# Allegro board PAI-POPA.brd
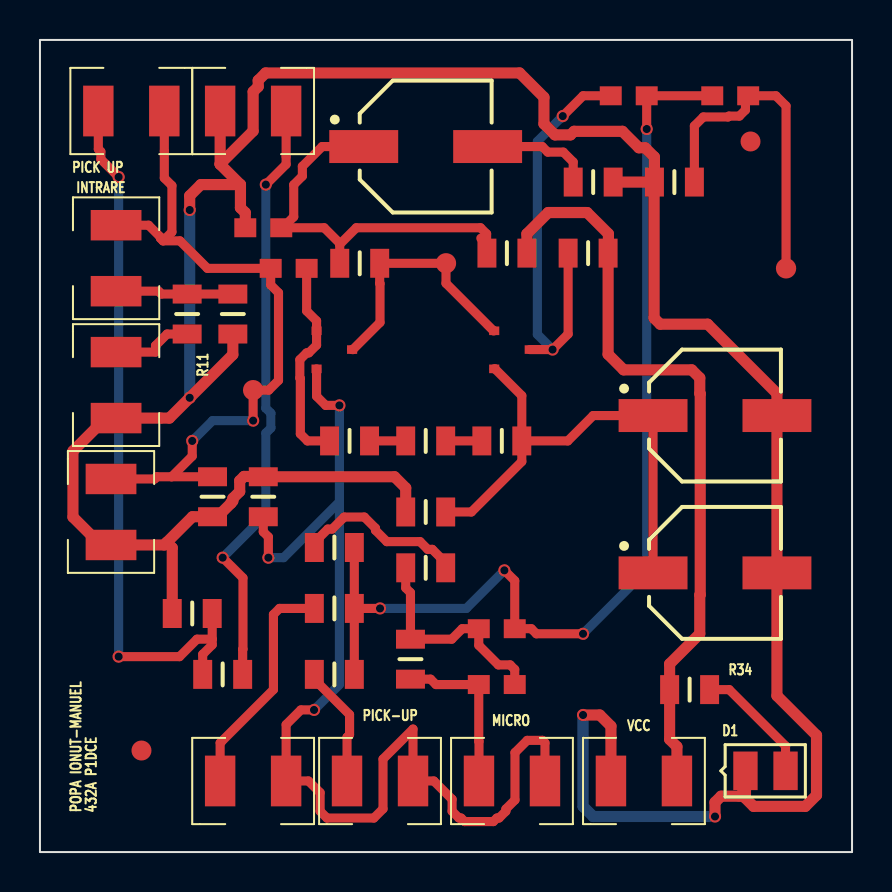
[diagram p0: board, top side]
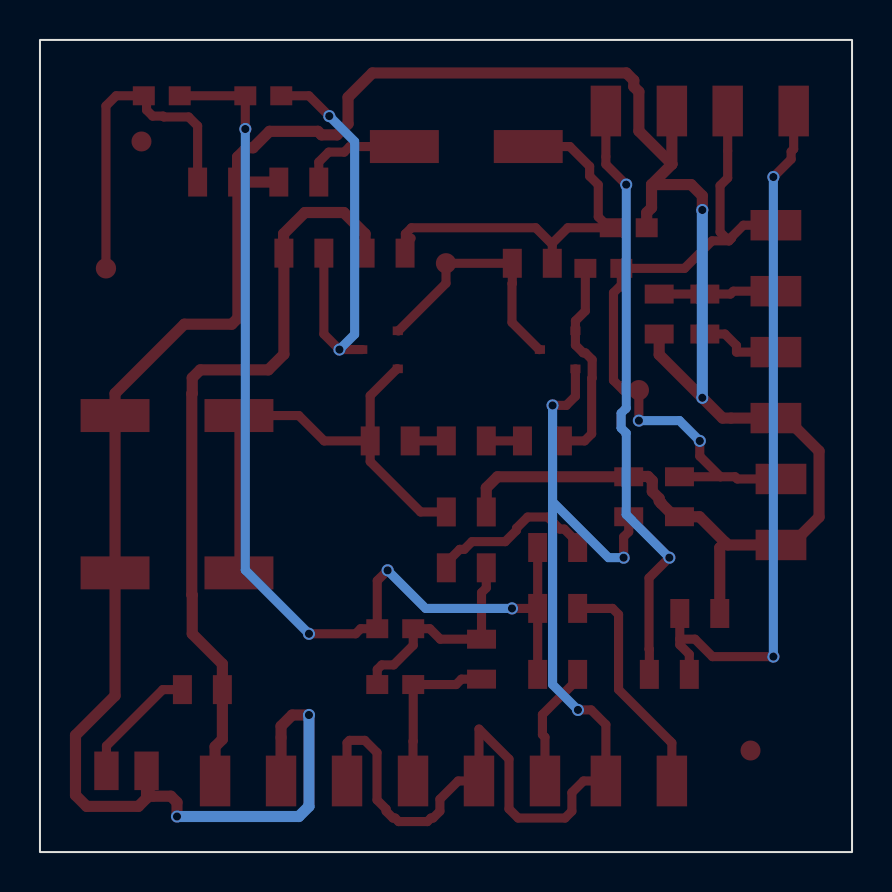
[diagram p1: board, bottom side, seen from below]

Outline 40.64 x 40.64 mm; copper layers: TOP, BOTTOM. Coordinates in mm from the lower left corner of the outline.
Outline path: rectangle 0,0 40.64,40.64

## Design rules (mm)
nets with their own width: min track width 0.305; nets 0 N12604 N12610 N12630 N12640 N12680 N12702 N12706 N12750 N12756 N12846 N13210 N13216 N13300 N13552 N14513 N14595 N15039 N15145 N15149 N16665 N16830 N21461 N130140

## Placement (name value [footprint] x y rotation side)
C11  4.7u  [CAPC2008X126N_0805]  12.45 29.21 0 top
C22  4.7u  [CAPC2008X126N_0805]  29.46 37.85 0 top
C32  4.7u  [CAPC2008X126N_0805]  34.54 37.85 0 top
C45  4.7u  [CAPC2008X126N_0805]  11.18 31.24 0 top
C46  1n  [CAPC2008X126N_0805]  22.86 8.38 0 top
C47  4.7n  [CAPC2008X126N_0805]  22.86 11.18 0 top
C48  10u  [CAPAE660X770N]  33.78 21.84 0 top
C49  10u  [CAPAE660X770N]  33.78 13.97 0 top
C50  10u  [CAPAE660X770N]  19.3 35.31 0 top
J6  -  [TP100]  20.32 29.46 0 top
J7  -  [TP100]  10.67 23.11 0 top
J12  Iesire  [TP100]  37.34 29.21 0 top
J*  1k  [RES2012X50N_0805#2]  3.81 29.72 90 top
J*#2  -  [RES2012X50N_0805#3]  35.31 4.06 0 top
J*#3  -  [RES2012X50N_0805#2]  17.02 3.56 180 top
J*#4  -  [RES2012X50N_0805#2]  30.23 3.56 180 top
J*#5  -  [RES2012X50N_0805]  32.51 8.13 180 top
MICRO  Mic., Pick-up mag  [1210RF_WV_12D]  23.62 3.56 180 top
MICRO.  Mic., Pick-up Mag.  [1210RF_WV_12D]  3.56 17.02 90 top
NOREF  -  [unnamed]  35.56 35.56 0 top
NOREF#2  -  [unnamed]  5.08 5.08 0 top
PICK UP  Pick-up Piezo  [1210RF_WV_12D]  4.57 37.08 0 top
PICK-UP  Pick-up Piezo  [1210RF_WV_12D]  10.67 37.08 0 top
Q1  QBC846B  [SOT23]  14.73 25.15 0 top
Q2  QBC846B  [SOT23]  23.62 25.15 0 top
R1  47k  [RES2012X50N_0805]  8.64 17.78 90 top
R3  10k  [RES2012X50N_0805]  19.3 20.57 0 top
R4  15k  [RES2012X50N_0805]  27.43 29.97 0 top
R5  1k  [RES2012X50N_0805]  19.3 17.02 0 top
R6  220k  [RES2012X50N_0805]  15.49 20.57 0 top
R7  100k  [RES2012X50N_0805]  14.73 12.19 0 top
R8  10k  [RES2012X50N_0805]  23.11 20.57 0 top
R11  100k  [RES2012X50N_0805]  7.37 26.92 90 top
R12  4.7k  [RES2012X50N_0805]  9.65 26.92 90 top
R13  22k  [RES2012X50N_0805]  31.75 33.53 0 top
R18  1k  [RES2012X50N_0805]  11.18 17.78 270 top
R21  68k  [RES2012X50N_0805]  16 29.46 180 top
R22  150k  [RES2012X50N_0805]  23.37 29.97 0 top
R25  1M  [RES2012X50N_0805]  27.69 33.53 180 top
R28  220k  [RES2012X50N_0805]  14.73 8.89 0 top
R29  68k  [RES2012X50N_0805]  18.54 9.65 90 top
R30  510k  [RES2012X50N_0805]  19.3 14.22 0 top
R31  330k  [RES2012X50N_0805]  14.73 15.24 0 top
R32  15k  [RES2012X50N_0805]  7.62 11.94 0 top
R33  1M  [RES2012X50N_0805]  9.14 8.89 0 top
RADIO  Radio, Mag.  [1210RF_WV_12D]  10.67 3.56 180 top
RADIO.  Intrare  [1210RF_WV_12D]  3.81 23.37 90 top

## Library data of the parts
C11 C22 C32 C45-C47 = C
C48-C50 = CAPACITOR POL_16
J6 J7 J12 = CON1
J* R1 R3-R8 R11-R13 R18 R21 R22 R25 R28-R33 = R
MICRO MICRO. PICK UP PICK-UP RADIO RADIO. = CON2
Q1 Q2 = QBC846B_2

## Footprints (pads in the part's own frame, mm; a bottom-side part is the same pattern mirrored in y, then rotated)
1210RF_WV_12D
  rect 1.524x2.54 smd: 1(-1.651,0) 2(1.651,0)
CAPAE660X770N
  rect 3.45x1.65 smd: 1(-3.1,0) 2(3.1,0)
CAPC2008X126N_0805
  rect 1.1x0.95 smd: 1(-0.9,0) 2(0.9,0)
RES2012X50N_0805
  rect 0.95x1.45 smd: 1(-1,0) 2(1,0)
RES2012X50N_0805#2
  rect 1.524x2.54 smd: 1(-1.651,0) 2(1.651,0)
RES2012X50N_0805#3
  rect 1.219x1.93 smd: A(2.007,0) C(0,0)
SOT23
  rect 0.508x0.432 smd: 1(-0.889,0.94) 2(-0.889,-0.965) 3(0.889,0)
TP100
  round 1.016 smd: 1(0,0)
unnamed
  round 1 smd: (0,0)

## Nets
0: C45.1 C48.2(-) C49.2(-) J*#2.C J*#4.2 MICRO..1 PICK-UP.1 R1.1 R5.1 R12.1 R13.1 R18.1 R25.1 R32.1 RADIO..1
N12604: R11.1 RADIO..2
N12610: J*.1 R11.2 R12.2
N12630: C11.1 J7.1 J*.2 MICRO..2 PICK UP.2 R1.2
N12640: C11.2 Q1.1(B) R6.1
N12680: J*#3.1 MICRO.1 Q1.2(E) R18.2 RADIO.1
N12702: J6.1 Q1.3(C) Q2.1(B) R21.1
N12706: J*#4.1 J*#5.2 R4.2 R22.2
N12750: C22.1 Q2.3(C) R4.1
N12756: C48.1(+) C49.1(+) Q2.2(E) R5.2 R8.2
N12846: C22.2 C32.1 C47.2 R7.2 R28.2 R31.2
N13210: R3.2 R8.1
N13216: C45.2 C50.1(+) R21.2 R22.1
N13300: C32.2 J12.1 R13.2
N13552: C50.2(-) R25.2
N14513: R7.1 RADIO.2
N14595: J*#3.2 R28.1
N15039: C46.1 MICRO.2 R29.1
N15145: R30.2 R31.1
N15149: C46.2 C47.1 R29.2 R30.1
N16665: PICK UP.1 R32.2 R33.1
N16830: PICK-UP.2 R33.2
N21461: J*#2.A J*#5.1
N130140: R3.1 R6.2

## Via types
v1: diameter 0.61, hole 0.406, TOP to BOTTOM, 19 vias

## Routing (per net, layer and track width the routed paths; a pad name or vN(x,y) marks a point on that pad's centre or on a via; arc(x,y) is an arc through that point)
0: length 148
  TOP w0.559: 6.35,15.5 7.63,16.78 R1.1 8.89,16.78 9.56,17.45 9.56,17.48 9.65,17.57 9.65,17.7 10,18.04 10,18.58 10.21,18.8 11.16,18.8 R18.1 ; 6.35,15.5 6.62,15.22 R32.1 ; 6.35,15.5 6.22,15.37 MICRO..1 3.05,15.37 1.65,16.76 1.65,20.07 3.3,21.72 RADIO..1 6.48,21.72 v1(7.49,22.73) 9.65,24.89 R12.1 ; 9.02,34.43 PICK-UP.1 ; 9.02,34.43 10.67,36.08 10.67,38.05 10.92,38.3 10.92,38.62 11.29,38.99 24,38.99 25.22,37.77 25.22,36.44 25.77,35.89 26.55,35.89 26.73,36.07 29.15,36.07 29.97,35.24 30.29,35.24 30.75,34.78 R13.1 ; 9.02,34.43 9.02,34.42 10.03,33.4 ; R18.1 17.75,18.78 18.3,18.22 R5.1 ; R18.1 10.93,18.78 ; 10.03,33.4 8.05,33.4 7.49,32.84 v1(7.49,32.13) ; 10.03,33.4 10.03,32.24 10.28,32 C45.1 ; 35.31,3.1 35.31,2.69 35.71,2.29 38.3,2.29 38.86,2.84 38.86,5.84 36.88,7.82 C49.2 C48.2 36.88,22.95 33.41,26.42 31.04,26.42 30.73,26.72 30.73,33.51 R13.1 ; 35.31,3.1 J*#2.C ; 35.31,3.1 35,2.79 34.09,2.79 33.78,2.49 v1(33.78,1.78) ; J*#4.2 28.57,6.3 28.02,6.86 v1(27.18,6.86) ; R25.1 R13.1
  BOTTOM w0.559: v1(33.78,1.78) 27.69,1.78 27.18,2.29 v1(27.18,6.86) ; v1(7.49,22.73) v1(7.49,32.13)
N12604: length 4.1
  TOP w0.457: R11.1 6.36,25.92 5.78,25.35 5.78,25.02 RADIO..2
N12610: length 5.9
  TOP w0.457: J*.1 5.94,28.07 6.08,27.92 R11.2 R12.2
N12630: length 35.1
  TOP w0.457: 6.16,30.59 6.03,30.72 6.03,30.78 5.44,31.37 J*.2 ; 6.16,30.59 7.01,30.59 8.38,29.21 C11.1 11.55,28.38 11.94,27.99 11.94,23.6 11.45,23.11 J7.1 v1(10.67,21.59) ; 6.16,30.59 6.6,31.03 6.6,33.35 6.22,33.73 PICK UP.2 ; MICRO..2 5.74,18.67 5.85,18.78 6.59,18.78 ; R1.2 6.59,18.78 ; 6.59,18.78 7.62,19.81 v1(7.62,20.57)
  BOTTOM w0.457: v1(10.67,21.59) 8.64,21.59 v1(7.62,20.57)
N12640: length 10.5
  TOP w0.457: C11.2 13.35,27.08 13.84,26.58 Q1.1 13.84,25.37 13.45,24.98 13.35,24.98 13,24.64 13,23.72 13.03,23.7 13.03,20.93 13.39,20.57 R6.1
N12680: length 56.3
  TOP w0.457: R18.2 11.18,16.03 11.43,15.77 v1(11.43,14.73) ; Q1.2 13.84,22.81 14.3,22.35 v1(14.99,22.35) ; MICRO.1 25.27,5.46 25.15,5.59 24.38,5.59 23.77,4.98 23.77,2.61 23.32,2.15 23.32,2.04 22.98,1.7 22.87,1.7 22.69,1.52 21.25,1.52 21.07,1.7 20.97,1.7 20.62,2.04 20.62,2.64 19.71,3.56 J*#3.1 18.67,6.15 17.17,4.65 17.17,2.16 16.71,1.7 14.36,1.7 14.02,2.04 14.02,2.97 13.44,3.56 12.32,3.56 12.32,6.38 13.06,7.11 v1(13.72,7.11)
  BOTTOM w0.457: 14.99,17.53 12.19,14.73 v1(11.43,14.73) ; 14.99,17.53 v1(14.99,22.35) ; 14.99,17.53 14.99,8.38 v1(13.72,7.11)
N12702: length 12.6
  TOP w0.457: Q2.1 22.69,26.09 20.32,28.46 J6.1 R21.1 17,28.46 17.02,28.44 17.02,26.5 15.66,25.15 Q1.3
N12706: length 38
  TOP w0.559: R22.2 24.37,30.94 25.43,32 27.38,32 28.45,30.94 28.45,29.99 R4.2 28.43,24.91 29.21,24.13 32.62,24.13 33.02,23.73 33.02,22.95 33.04,22.93 33.04,12.88 33.02,12.86 33.02,10.92 31.51,9.41 J*#5.2 31.51,5.64 31.88,5.27 J*#4.1
N12750: length 21.6
  TOP w0.457: v1(26.16,36.83) 27.18,37.85 C22.1 ; R4.1 26.43,25.92 v1(25.65,25.15) Q2.3
  BOTTOM w0.457: v1(26.16,36.83) 24.89,35.56 24.89,25.91 v1(25.65,25.15)
N12756: length 25.1
  TOP w0.457: Q2.2 22.77,24.18 24.11,22.84 R8.2 ; R8.2 24.11,19.54 21.59,17.02 R5.2 ; R8.2 26.42,20.57 27.69,21.84 C48.1 C49.1
N12846: length 52.8
  TOP w0.457: v1(27.18,10.92) 24.84,10.92 24.59,11.18 C47.2 23.76,13.58 v1(23.24,14.1) ; v1(30.36,36.18) C22.2 C32.1 ; R7.2 R31.2 ; R7.2 R28.2 ; R7.2 v1(17.02,12.19)
  BOTTOM w0.457: v1(17.02,12.19) 21.34,12.19 v1(23.24,14.1) ; v1(30.36,36.18) 30.36,14.11 v1(27.18,10.92)
N13210: length 1.8
  TOP w0.457: R3.2 R8.1
N13216: length 20.9
  TOP w0.457: 15,30.41 15,30.46 14.22,31.24 12.15,31.24 ; 15,30.41 15.83,31.24 22.05,31.24 22.35,30.94 22.35,29.99 R22.1 22.37,30.41 22.06,30.72 ; 15,30.41 R21.2 ; C50.1 14.12,35.31 13.13,34.31 13.13,33.83 12.7,33.39 12.7,31.79 12.15,31.24 ; 12.15,31.24 C45.2
N13300: length 16.7
  TOP w0.457: J12.1 37.34,37.34 36.83,37.85 C32.2 35.31,37.71 35.31,37.13 35,36.83 34.48,36.83 34.44,36.79 33.2,36.79 32.75,36.34 R13.2
N13552: length 5.6
  TOP w0.457: R25.2 26.69,34.53 26.19,35.03 25.41,35.03 25.14,35.31 C50.2
N14513: length 11.6
  TOP w0.457: R7.1 11.99,12.19 11.68,11.89 11.68,8.13 9.02,5.46 RADIO.2
N14595: length 6.1
  TOP w0.457: R28.1 13.73,8.64 15.49,6.88 15.49,5.87 15.37,5.75 J*#3.2
N15039: length 8.4
  TOP w0.457: R29.1 19.55,8.65 19.82,8.38 C46.1 21.96,5.55 21.97,5.54 MICRO.2
N15145: length 8.6
  TOP w0.457: R30.2 20.3,14.47 19.63,15.15 19.41,15.15 19.02,15.53 17.36,15.53 16.79,16.1 16.79,16.21 16.23,16.76 15.22,16.76 14.62,16.16 14.4,16.16 13.73,15.49 R31.1
N15149: length 11.2
  TOP w0.457: C46.2 23.76,9.14 23.53,9.36 22.94,9.36 21.96,10.35 C47.1 21.13,11.18 20.61,10.65 R29.2 18.54,12.98 18.3,13.22 R30.1
N16665: length 36
  TOP w0.457: v1(3.94,9.78) 6.99,9.78 7.86,10.65 8.62,10.65 ; 8.62,10.65 8.62,10.37 8.14,9.89 R33.1 ; 8.62,10.65 R32.2 ; v1(3.94,33.78) 3.05,34.67 3.05,35.05 2.92,35.18 2.92,37.08
  BOTTOM w0.457: v1(3.94,33.78) v1(3.94,9.78)
N16830: length 30.1
  TOP w0.457: 12.32,37.08 12.32,34.42 v1(11.3,33.4) ; R33.2 10.14,10.14 10.16,10.16 10.16,13.72 v1(9.14,14.73)
  BOTTOM w0.457: v1(9.14,14.73) 11.3,16.89 11.3,20.97 11.56,21.22 11.56,21.96 11.3,22.21 v1(11.3,33.4)
N21461: length 6.2
  TOP w0.457: J*#2.A 37.31,5.31 34.49,8.13 J*#5.1
N130140: length 1.8
  TOP w0.457: R3.1 R6.2

## Text on the board
Ref Des/Silkscreen Top: INTRARE | PICK-UP | VCC | D1 | R34 | POPA IONUT-MANUEL | 432A P1DCE
XSECTION_CHART: *  SURFACE - AIR 0 MIL | L1: TOP CONDUCTOR - COPPER 0.7 MIL | *  DIELECTRIC - FR-4 58.6 MIL | L2: BOTTOM CONDUCTOR - COPPER 0.7 MIL | DESIGN CROSS SECTION CHART | ___________________________ | TOTAL THICKNESS 60 MIL | 1-2
PLACE_BOUND_TOP: FIGURE | SIZE | 16.0 | DRILL CHART: TOP to BOTTOM | ALL UNITS ARE IN MILS | PLATED | QTY | 19
